# Altium PCB ESP32.PcbDoc
Units mm, origin at the board's own origin, x right, y up, seen from the top; angles counter-clockwise.
Board outline 66.88 x 28.97 mm, 2 copper layers (Top Layer, Bottom Layer); 62 components, 74 nets, 294 pads, 37 vias.
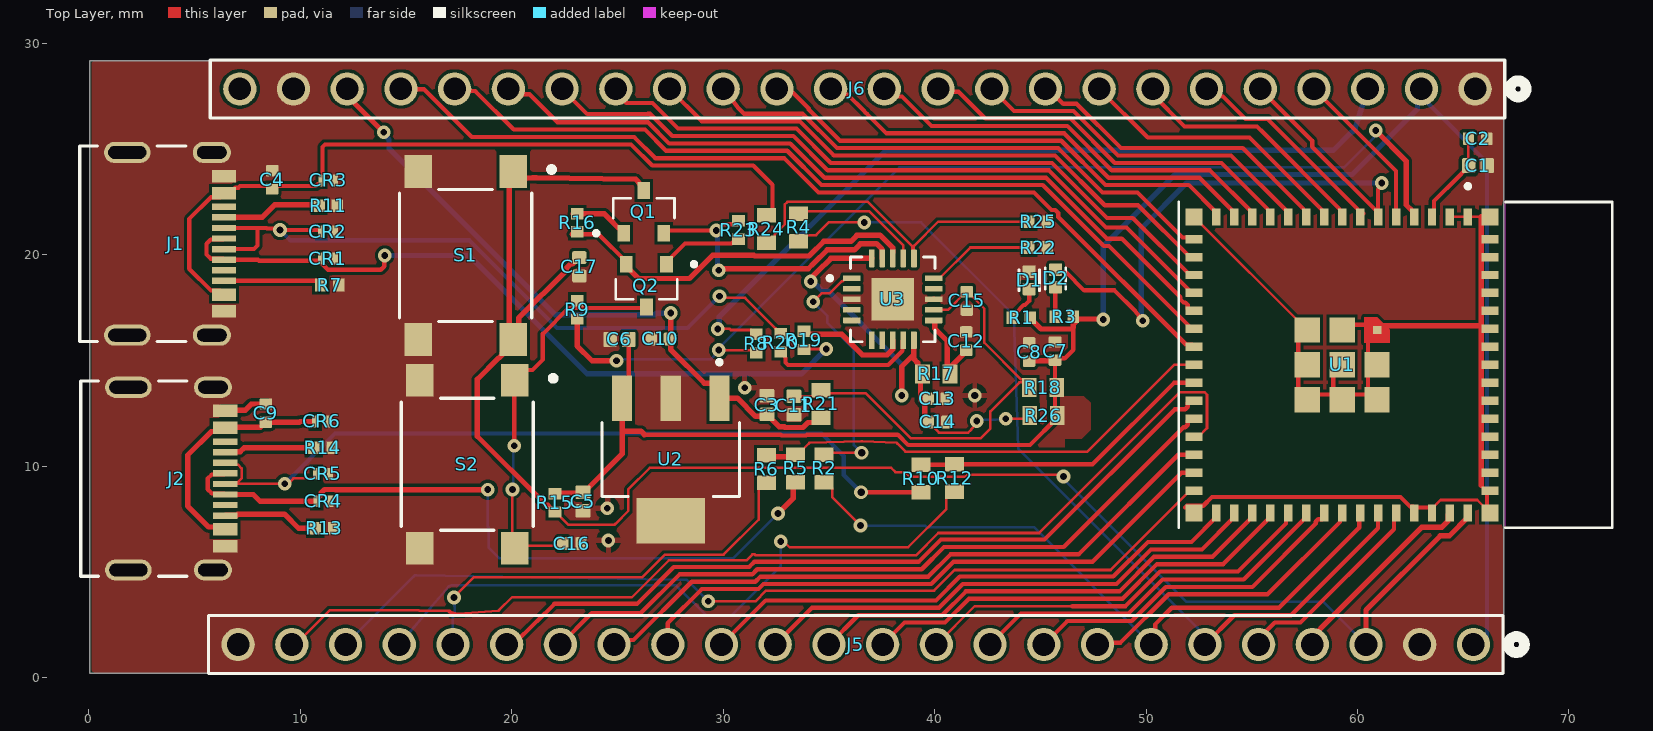
[diagram p0: Top Layer view]
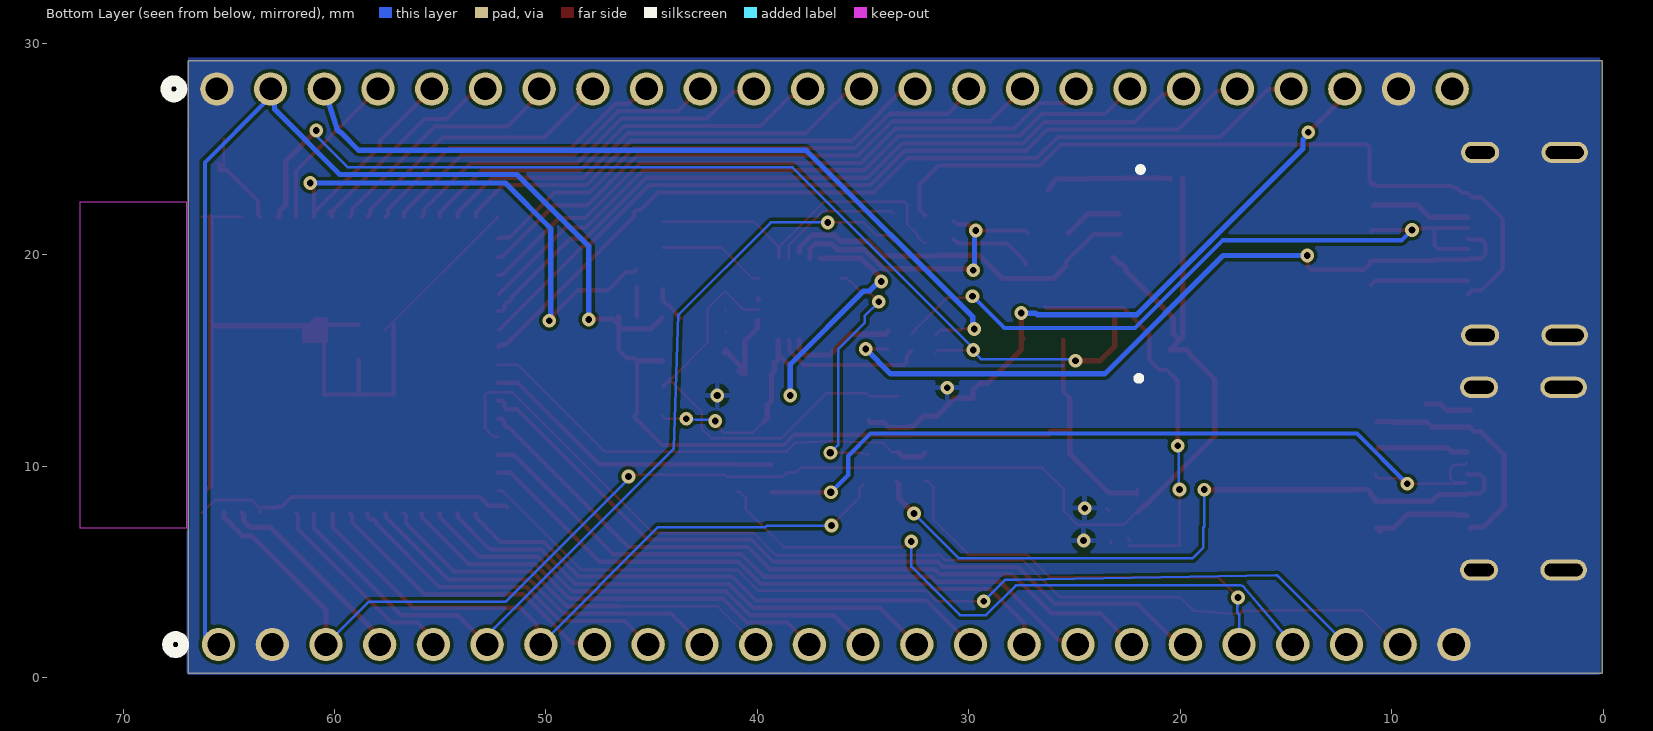
[diagram p1: Bottom Layer view, seen from below]
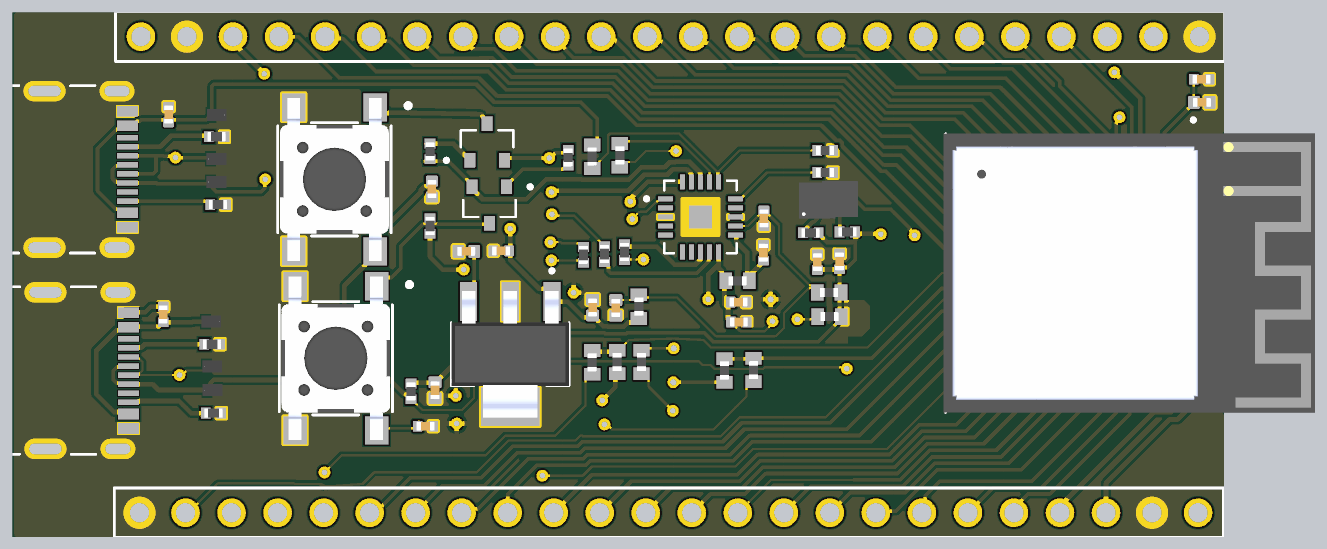
[diagram p2: 3D render of the assembled board from above, using the file's embedded part models]

## Layer stack, top to bottom
Top Solder: solder mask 0.0102, Solder Resist, Dk 3.5
Top Layer: signal copper 0.0356
Dielectric 1: dielectric 0.32, FR-4, Dk 4.8
Bottom Layer: signal copper 0.0356
Bottom Solder: solder mask 0.0102, Solder Resist, Dk 3.5

## Board outline
0.048,0.225 0.048,29.194 66.925,29.194 66.925,0.225

## Design rules (kind name [scope] priority, off if disabled: settings)
Clearance [All] p1: gap=0.15 ignorepadtopadclearanceinfootprint=TRUE
MinimumSolderMaskSliver [All] p1: minsoldermaskwidth=0
PolygonConnect PolygonConnect_9 [All vs IsNamedPolygon('NONET_L01_P003')] p1: thpad.connectstyle=Direct thpad.reliefconductorwidth=0.254 thpad.reliefentries=4 thpad.polygonreliefangle="90 Angle" thpad.airgapwidth=0.254 smdpad.connectstyle=Direct smdpad.reliefconductorwidth=0.254 smdpad.reliefentries=4 smdpad.polygonreliefangle="90 Angle" smdpad.airgapwidth=0.254 via.connectstyle=Relief via.reliefconductorwidth=0.254 via.reliefentries=4 via.polygonreliefangle="90 Angle" via.airgapwidth=0.254
PolygonConnect PolygonConnect_8 [All vs IsNamedPolygon('+3V3_L01_P002')] p2: thpad.connectstyle=Direct thpad.reliefconductorwidth=0.254 thpad.reliefentries=4 thpad.polygonreliefangle="90 Angle" thpad.airgapwidth=0.254 smdpad.connectstyle=Direct smdpad.reliefconductorwidth=0.254 smdpad.reliefentries=4 smdpad.polygonreliefangle="90 Angle" smdpad.airgapwidth=0.254 via.connectstyle=Relief via.reliefconductorwidth=0.254 via.reliefentries=4 via.polygonreliefangle="90 Angle" via.airgapwidth=0.254
PolygonConnect PolygonConnect_7 [All vs IsNamedPolygon('GND_L01_P001')] p3: thpad.connectstyle=Direct thpad.reliefconductorwidth=0.254 thpad.reliefentries=4 thpad.polygonreliefangle="90 Angle" thpad.airgapwidth=0.254 smdpad.connectstyle=Direct smdpad.reliefconductorwidth=0.254 smdpad.reliefentries=4 smdpad.polygonreliefangle="90 Angle" smdpad.airgapwidth=0.254 via.connectstyle=Relief via.reliefconductorwidth=0.254 via.reliefentries=4 via.polygonreliefangle="90 Angle" via.airgapwidth=0.254
PolygonConnect PolygonConnect_6 [All vs IsNamedPolygon('GND_L01_P001')] p4: connectstyle=Relief reliefconductorwidth=0.254 reliefentries=4 polygonreliefangle="90 Angle" airgapwidth=0.254
PolygonConnect PolygonConnect_5 [All vs IsNamedPolygon('GND_L01_P001')] p5: thpad.connectstyle=Direct thpad.reliefconductorwidth=0.254 thpad.reliefentries=4 thpad.polygonreliefangle="90 Angle" thpad.airgapwidth=0.254 smdpad.connectstyle=Direct smdpad.reliefconductorwidth=0.254 smdpad.reliefentries=4 smdpad.polygonreliefangle="90 Angle" smdpad.airgapwidth=0.254 via.connectstyle=Relief via.reliefconductorwidth=0.254 via.reliefentries=4 via.polygonreliefangle="90 Angle" via.airgapwidth=0.254
PolygonConnect PolygonConnect_4 [All vs IsNamedPolygon('GND_L01_P001')] p6: thpad.connectstyle=Direct thpad.reliefconductorwidth=0.254 thpad.reliefentries=4 thpad.polygonreliefangle="90 Angle" thpad.airgapwidth=0.254 smdpad.connectstyle=Direct smdpad.reliefconductorwidth=0.254 smdpad.reliefentries=4 smdpad.polygonreliefangle="90 Angle" smdpad.airgapwidth=0.254 via.connectstyle=Relief via.reliefconductorwidth=0.254 via.reliefentries=4 via.polygonreliefangle="90 Angle" via.airgapwidth=0.254
PolygonConnect PolygonConnect_3 [All vs IsNamedPolygon('GND_L01_P001')] p7: thpad.connectstyle=Direct thpad.reliefconductorwidth=0.254 thpad.reliefentries=4 thpad.polygonreliefangle="90 Angle" thpad.airgapwidth=0.254 smdpad.connectstyle=Direct smdpad.reliefconductorwidth=0.254 smdpad.reliefentries=4 smdpad.polygonreliefangle="90 Angle" smdpad.airgapwidth=0.254 via.connectstyle=Relief via.reliefconductorwidth=0.254 via.reliefentries=4 via.polygonreliefangle="90 Angle" via.airgapwidth=0.254
PolygonConnect PolygonConnect_2 [All vs IsNamedPolygon('GND_L01_P001')] p8: thpad.connectstyle=Direct thpad.reliefconductorwidth=0.254 thpad.reliefentries=4 thpad.polygonreliefangle="90 Angle" thpad.airgapwidth=0.254 smdpad.connectstyle=Relief smdpad.reliefconductorwidth=0.254 smdpad.reliefentries=4 smdpad.polygonreliefangle="90 Angle" smdpad.airgapwidth=0.254 via.connectstyle=Relief via.reliefconductorwidth=0.254 via.reliefentries=4 via.polygonreliefangle="90 Angle" via.airgapwidth=0.254
PolygonConnect PolygonConnect_1 [All vs IsNamedPolygon('GND_L02_P000')] p9: thpad.connectstyle=Direct thpad.reliefconductorwidth=0.254 thpad.reliefentries=4 thpad.polygonreliefangle="90 Angle" thpad.airgapwidth=0.254 smdpad.connectstyle=Relief smdpad.reliefconductorwidth=0.254 smdpad.reliefentries=4 smdpad.polygonreliefangle="90 Angle" smdpad.airgapwidth=0.254 via.connectstyle=Relief via.reliefconductorwidth=0.254 via.reliefentries=4 via.polygonreliefangle="90 Angle" via.airgapwidth=0.254
PolygonConnect [All] p10: connectstyle=Relief reliefconductorwidth=0.254 reliefentries=4 polygonreliefangle="90 Angle" airgapwidth=0.254
RoutingVias [All] p1: holewidth=0.35 width=0.63 viastyle="Through Hole" minholewidth=0.3 minwidth=0.65 maxholewidth=0.32 maxwidth=0.6
SilkToSolderMaskClearance [IsPad] p1: minsilkscreentomaskgap=0.1 clearancetoexposedcopper=TRUE
SolderMaskExpansion [All] p1: expansion=0.102 istentingtop=FALSE
Width Width_1 [All] p1: maxlimit=0.254 minlimit=0.12 preferedwidth=0.2
28 further rules are at their usual default settings.

## Components (designator, comment, footprint, x,y, rotation, side; value= is the part's Value field where it differs from the comment)
C1 "10uF,10V" CAPC1005X90N 65.7,24.225 r0 top
C2 "0.1uF,50V" CAPC1005X55N#1 65.682,25.5 r180 top
C3 "4.7uF" CAPC1005X55N#2 32.075,12.9 r270 top
C4 "0.1uF,50V" CAPC1005X55N#1 8.675,23.55 r270 top
C5 "10uF" CAPC1005X90N 23.375,8.336 r90 top
C6 "10uF" CAPC1005X90N 25.1,16 r0 top
C7 "0.1uF,50V" CAPC1005X55N#1 45.7,15.45 r270 top
C8 "0.1uF,50V" CAPC1005X55N#1 44.475,15.407 r270 top
C9 "0.1uF,50V" CAPC1005X55N#1 8.375,12.518 r270 top
C10 "0.1uF,50V" CAPC1005X55N#1 27.025,16.025 r0 top
C11 "4.7uF" CAPC1005X55N#2 33.35,12.875 r90 top
C12 "100nF,50V" CAPC1005X55N#1 41.5,15.925 r270 top
C13 "100nF,50V" CAPC1005X55N#1 40.125,13.2 r180 top
C14 "100nF,50V" CAPC1005X55N#1 40.143,12.1 r180 top
C15 "100nF,50V" CAPC1005X55N#1 41.525,17.825 r90 top
C16 "100nF,50V" CAPC1005X55N#1 22.85,6.35 r180 top
C17 "1uF,35V" CAPC1005X65N 23.2,19.437 r270 top
CR1 "AQ3045-01ETG" RTVS_SOD882_LTF 11.308,19.825 r0 top
CR2 "AQ3045-01ETG" RTVS_SOD882_LTF 11.308,21.1 r0 top
CR3 "AQ3045-01ETG" RTVS_SOD882_LTF 11.325,23.525 r180 top
CR4 "AQ3045-01ETG" RTVS_SOD882_LTF 11.1,8.35 r0 top
CR5 "AQ3045-01ETG" RTVS_SOD882_LTF 11.075,9.65 r0 top
CR6 "AQ3045-01ETG" RTVS_SOD882_LTF 11.025,12.125 r180 top
D1 "GREEN" LEDC1005X35N 44.475,18.8 r90 top
D2 "RED" LEDC1005X35N 45.725,18.885 r90 top
J1 "2171790001" MOLEX_2171790001 2.975,20.525 r270 top
J2 "2171790001" MOLEX_2171790001 3.025,9.42 r270 top
J5 "22284245" CONN_SD-42375-001_M295_24_MOL 65.485,1.575 r0 top
J6 "22284245" CONN_SD-42375-001_M295_24_MOL 65.565,27.85 r0 top
Q1 "SS8050-G" TRANS_SS8050-G 26.25,22.035 r90 top
Q2 "SS8050-G" TRANS_SS8050-G 26.375,18.55 r270 top
R1 "1k" RESC1005X40N#1 44.105,17.025 r180 top
R2 "0R" RESC1005X40 34.775,9.9 r270 top
R3 "1k" RESC1005X40N#1 46.13,17.075 r180 top
R4 "0R" RESC1005X40 33.575,21.3 r90 top
R5 "0R" RESC1005X40 33.425,9.9 r270 top
R6 "0R" RESC1005X40 32.05,9.875 r270 top
R7 "5.1k" RESC1005X40N#2 11.4,18.575 r180 top
R8 "27ohm" RESC1005X40N#2 31.575,15.807 r270 top
R9 "27ohm" RESC1005X40N#2 23.1,17.4 r270 top
R10 "0R" RESC1005X40 39.35,9.425 r270 top
R11 "5.1k" RESC1005X40N#2 11.325,22.325 r180 top
R12 "0R" RESC1005X40 40.95,9.45 r270 top
R13 "5.1k" RESC1005X40N#2 11.15,7.075 r180 top
R14 "5.1k" RESC1005X40N#2 11.075,10.875 r180 top
R15 "AC0402FR-0710KL" RESC1005X37N 22.05,8.275 r90 top
R16 "AC0402FR-0710KL" RESC1005X37N 23.1,21.518 r90 top
R17 "0R" RESC1005X40 40.075,14.375 r180 top
R18 "0R" RESC1005X40 45.125,13.725 r0 top
R19 "27R" RESC1005X40N#2 33.825,15.959 r90 top
R20 "27R" RESC1005X40N#2 32.725,15.85 r270 top
R21 "0R" RESC1005X40 34.625,12.95 r270 top
R22 "10k" RESC1005X37N 44.9,20.35 r0 top
R23 "AC0402FR-0710KL" RESC1005X37N 30.725,21.175 r270 top
R24 "4k7" RESC1005X40 32.05,21.225 r90 top
R25 "10k" RESC1005X37N 44.9,21.575 r0 top
R26 "0R" RESC1005X40 45.15,12.4 r0 top
S1 "SWITCH" SWITCH_43SMTR92LFS 17.825,19.975 r270 top
S2 "SWITCH" SWITCH_43SMTR92LFS 17.9,10.1 r270 top
U1 "ESP32-S3-MINI-1-N8" XCVR_ESP32-S3-MINI-1-N8 59.275,14.8 r270 top
U2 "TL1963A-33DCYR" VREG_TL1963A-33DCYR 27.525,10.325 r270 top
U3 "FT231XQ-R" QFN50P400X400X80-21N 38.025,17.9 r0 top

## Footprints (in the part's own frame and the unit in brackets; to place one, negate y for a bottom-side part, rotate by r counter-clockwise, add the part's x,y. Pads: shape width x height; smd on the part's side, far side on the other; paste and mask are expansions set on the pad)
CAPC1005X55N#1 [mm]
  rrect25% 0.54x0.6 smd: 1(-0.432,0) 2(0.432,0)
  body extent -0.5,-0.25 0.5,0.25, height 0.55
CAPC1005X55N#2 [mm]
  rrect25% 0.64x0.72 smd paste+0 mask+0.102: 1(-0.439,0) 2(0.439,0)
  body extent -0.5,-0.25 0.5,0.25, height 0.55
CAPC1005X65N [mm]
  rrect25% 0.6x0.67 smd: 1(-0.437,0) 2(0.437,0)
  body extent -0.5,-0.25 0.5,0.25, height 0.65
CAPC1005X90N [mm]
  rrect25% 0.64x0.72 smd: 1(-0.439,0) 2(0.439,0)
  body extent -0.5,-0.25 0.5,0.25, height 0.9
CONN_SD-42375-001_M295_24_MOL [mil]
  round 62 hole 42: 1(0,0) 2(-100,0) 3(-200,0) 4(-300,0) 5(-400,0) 6(-500,0) 7(-600,0) 8(-700,0) 9(-800,0) 10(-900,0) 11(-1000,0) 12(-1100,0) 13(-1200,0) 14(-1300,0) 15(-1400,0) 16(-1500,0) 17(-1600,0) 18(-1700,0) 19(-1800,0) 20(-1900,0) 21(-2000,0) 22(-2100,0) 23(-2200,0) 24(-2300,0)
  silkscreen extent -2355,-54 95,54
LEDC1005X35N [mm]
  rrect15% 0.59x0.61 smd: 1(-0.415,0) 2(0.415,0)
  silkscreen extent -0.5,-0.49 0.5,0.49, body extent -1,-1 1,1, height 0.8
MOLEX_2171790001 [mm]
  rect 0.59x1.15 smd mask+0.064: A1B12(-3.2,3.425) A4B9(-2.4,3.425) B1A12(3.2,3.425) B4A9(2.4,3.425)
  rect 0.298x1.15 smd mask+0.064: A5(-1.25,3.425) A6(-0.25,3.425) A7(0.25,3.425) A8(1.25,3.425) B5(1.75,3.425) B6(0.75,3.425) B7(-0.75,3.425) B8(-1.75,3.425)
  oval 1x2.2 hole 0.6 slot 1.8 at 90 deg mask+0.064: SH1(-4.32,-1.15) SH2(4.32,-1.15)
  oval 1x1.8 hole 0.6 slot 1.4 at 90 deg mask+0.064: SH3(-4.32,2.85) SH4(4.32,2.85)
  silkscreen extent -4.62,-3.4 4.62,1.63
QFN50P400X400X80-21N [mm]
  rrect25% 0.84x0.27 smd: 1(-1.935,1) 2(-1.935,0.5) 3(-1.935,0) 4(-1.935,-0.5) 5(-1.935,-1) 11(1.935,-1) 12(1.935,-0.5) 13(1.935,0) 14(1.935,0.5) 15(1.935,1)
  rrect25% 0.27x0.84 smd: 6(-1,-1.935) 7(-0.5,-1.935) 8(0,-1.935) 9(0.5,-1.935) 10(1,-1.935) 16(1,1.935) 17(0.5,1.935) 18(0,1.935) 19(-0.5,1.935) 20(-1,1.935)
  rect 2x2 smd paste-0.37: 21(0,0)
  silkscreen extent -3.07,-2 2,2
RESC1005X37N [mm]
  rect 0.54x0.6 smd: 1(-0.432,0) 2(0.432,0)
  body extent -0.5,-0.25 0.5,0.25, height 0.37
RESC1005X40 [mm]
  rect 0.7x0.9 smd: 1(-0.65,0) 2(0.65,0)
  body extent -0.5,-0.25 0.5,0.25, height 0.4
RESC1005X40N#1 [mm]
  rect 0.54x0.6 smd: 1(-0.43,0) 2(0.43,0)
  body extent -0.5,-0.25 0.5,0.25, height 0.4
RESC1005X40N#2 [mm]
  rect 0.54x0.6 smd: 1(-0.432,0) 2(0.432,0)
  body extent -0.5,-0.25 0.5,0.25, height 0.4
RTVS_SOD882_LTF [mil]
  rect 12x22 smd paste+0 mask+0: 1(-12.5,0) 2(12.5,0)
  body extent -21,-13 21,13, height 22
SWITCH_43SMTR92LFS [mm]
  rect 1.549x1.295 smd: 1(-3.975,2.25) 2(3.975,2.25) 3(-3.975,-2.25) 4(3.975,-2.25)
  silkscreen extent -4.19,-3.12 3.12,4.19, body extent -4.5,-3 4.5,3, height 4.3
TRANS_SS8050-G [mm]
  rect 0.8x0.6 smd: 1(-1.01,0.95) 2(-1.01,-0.95) 3(1.01,0)
  silkscreen extent -1.11,-1.45 0.65,2.35
VREG_TL1963A-33DCYR [mm]
  rect 2.15x0.95 smd: 1(-2.9,2.3) 2(-2.9,0) 3(-2.9,-2.3)
  rect 2.15x3.25 smd: 4(2.9,0)
  silkscreen extent -4.7,-3.25 1.75,3.25, body extent -3.5,-3.25 3.5,3.25, height 1.8
XCVR_ESP32-S3-MINI-1-N8 [mm]
  rect 0.8x0.4 smd: 1(-7,5.95) 2(-7,5.1) 3(-7,4.25) 4(-7,3.4) 5(-7,2.55) 6(-7,1.7) 7(-7,0.85) 8(-7,0) 9(-7,-0.85) 10(-7,-1.7) 11(-7,-2.55) 12(-7,-3.4) 13(-7,-4.25) 14(-7,-5.1) 15(-7,-5.95) 31(7,-5.95) 32(7,-5.1) 33(7,-4.25) 34(7,-3.4) 35(7,-2.55) 36(7,-1.7) 37(7,-0.85) 38(7,0) 39(7,0.85) 40(7,1.7) 41(7,2.55) 42(7,3.4) 43(7,4.25) 44(7,5.1) 45(7,5.95)
  rect 0.4x0.8 smd: 16(-5.95,-7) 17(-5.1,-7) 18(-4.25,-7) 19(-3.4,-7) 20(-2.55,-7) 21(-1.7,-7) 22(-0.85,-7) 23(0,-7) 24(0.85,-7) 25(1.7,-7) 26(2.55,-7) 27(3.4,-7) 28(4.25,-7) 29(5.1,-7) 30(5.95,-7) 46(5.95,7) 47(5.1,7) 48(4.25,7) 49(3.4,7) 50(2.55,7) 51(1.7,7) 52(0.85,7) 53(0,7) 54(-0.85,7) 55(-1.7,7) 56(-2.55,7) 57(-3.4,7) 58(-4.25,7) 59(-5.1,7) 60(-5.95,7)
  rect 1.2x1.2 smd: 61(0,0) 61_2(0,1.65) 61_3(1.65,1.65) 61_4(1.65,0) 61_5(1.65,-1.65) 61_6(0,-1.65) 61_7(-1.65,-1.65) 61_8(-1.65,0)
  rect 0.4x0.4 smd paste-1 mask+0: 61_1(-1.65,1.65)
  rect 0.8x0.8 smd: 62(-7,7) 63(-7,-7) 64(7,-7) 65(7,7)
  Top Layer region: -1.05,1.05 -2.25,1.05 -2.25,1.65 -1.65,2.25 -1.05,2.25
  Keep-Out Layer region: 7.7,7.725 -7.7,7.725 -7.7,12.775 7.7,12.775
  Keep-Out Layer region: 7.7,7.725 -7.7,7.725 -7.7,12.775 7.7,12.775
  silkscreen extent -8.55,-7.73 7.7,12.78, body extent -7.7,-7.84 7.7,12.66, height 2.55

## Part data
C1 C5 C6: library part CL05A106MP8NUB8, "10 ÂµF Â±20% 10V Ceramic Capacitor X5R 0402 (1005 Metric)", Package="SMD-2 Samsung", Check_prices=https://www.snapeda.com/parts/CL05A106MP8NUB8/Samsung/view-part/?ref=eda, MF="Samsung Electro-Mechanics", MP=CL05A106MP8NUB8, SnapEDA_Link=https://www.snapeda.com/parts/CL05A106MP8NUB8/Samsung/view-part/?ref=snap
C2 C4 C7 C8 C9 C10 C12 C13 C14 C15 C16: library part CL05B104KB5NNNC, "0.1 ÂµF Â±10% 50V Ceramic Capacitor X7R 0402 (1005 Metric)", Package="SMD-2 Samsung", Check_prices=https://www.snapeda.com/parts/CL05B104KB5NNNC/Samsung/view-part/?ref=eda, MF="Samsung Electro-Mechanics", MP=CL05B104KB5NNNC, SnapEDA_Link=https://www.snapeda.com/parts/CL05B104KB5NNNC/Samsung/view-part/?ref=snap
C3 C11: library part CL05A475MO5LUNC, "4.7 ÂµF Â±20% 16V Ceramic Capacitor X5R 0402 (1005 Metric)", Package="SMD-2 Samsung", Check_prices=https://www.snapeda.com/parts/CL05A475MO5LUNC/Samsung/view-part/?ref=eda, MF="Samsung Electro-Mechanics", MP=CL05A475MO5LUNC, SnapEDA_Link=https://www.snapeda.com/parts/CL05A475MO5LUNC/Samsung/view-part/?ref=snap
C17: library part CL05A105KL5NRNC, "1 ÂµF Â±10% 35V Ceramic Capacitor X5R 0402 (1005 Metric)", Package="SMD-2 Samsung", Check_prices=https://www.snapeda.com/parts/CL05A105KL5NRNC/Samsung/view-part/?ref=eda, MF=Samsung, MP=CL05A105KL5NRNC, SnapEDA_Link=https://www.snapeda.com/parts/CL05A105KL5NRNC/Samsung/view-part/?ref=snap
CR1 CR2 CR3 CR4 CR5 CR6: "Description", Manufacturer_Name="Littelfuse Inc", Copyright="Copyright (C) 2025 Ultra Librarian. All rights reserved.", Manufacturer_Part_Number=AQ3045-01ETG, RefDes=RefDes, Type=Type
D1 D2: library part VLMG1500-GS08, "Yellow-Green 571nm LED Indication - Discrete 2V 0402 (1005 Metric)", Package=Connector, Check_prices=https://www.snapeda.com/parts/VLMG1500-GS08/Vishay+Semiconductor+Opto+Division/view-part/?ref=eda, MF=Vishay, MP=VLMG1500-GS08, SnapEDA_Link=https://www.snapeda.com/parts/VLMG1500-GS08/Vishay+Semiconductor+Opto+Division/view-part/?ref=snap
J1: "USB Type C - Connector, Top-mount SMT, 16pos", JLCPCB Part #=C3197684, Manufacturer=Molex, Manufacturer Part #=217179-0001, Package=SMD, Check_prices=https://www.snapeda.com/parts/217179-0001/Molex/view-part/?ref=eda, SnapEDA_Link=https://www.snapeda.com/parts/217179-0001/Molex/view-part/?ref=snap
J2: "USB Type C - Connector, Top-mount SMT, 16pos", JLCPCB Part #=C3197684, Manufacturer=Molex, Package=SMD, Check_prices=https://www.snapeda.com/parts/217179-0001/Molex/view-part/?ref=eda, Manufacturer Part #=2171790001, SnapEDA_Link=https://www.snapeda.com/parts/217179-0001/Molex/view-part/?ref=snap
J5 J6: "Connector Header Through Hole 24 position 0.100 (2.54mm)", Package=None, Check_prices=https://www.snapeda.com/parts/22-28-4245/Molex/view-part/?ref=eda, MF=Molex, MP=22-28-4245, SnapEDA_Link=https://www.snapeda.com/parts/22-28-4245/Molex/view-part/?ref=snap
Q1 Q2: "Bipolar (BJT) Transistor NPN 25 V 1.5 A 100MHz 300 mW Surface Mount SOT-23-3", Package=None, Check_prices=https://www.snapeda.com/parts/SS8050G/Comchip/view-part/?ref=eda, Digi-Key_Part_Number=641-1790-2-ND, MF=Comchip, MP=SS8050G, SnapEDA_Link=https://www.snapeda.com/parts/SS8050G/Comchip/view-part/?ref=snap
R1 R3: library part RC0402FR-071KL, "1 kOhms Â±1% 0.063W, 1/16W Chip Resistor 0402 (1005 Metric) Moisture Resistant Thick Film", Package="0402-2 YAGEO", Check_prices=https://www.snapeda.com/parts/RC0402FR071KL/Yageo/view-part/?ref=eda, MF="Yageo Corporation", MP=RC0402FR071KL, SnapEDA_Link=https://www.snapeda.com/parts/RC0402FR071KL/Yageo/view-part/?ref=snap
R2 R4 R5 R6 R10 R12 R17 R18 R21 R26: library part RC0402JR-070RL, "0 Ohms Jumper 0.063W, 1/16W Chip Resistor 0402 (1005 Metric) Moisture Resistant Thick Film", Package="0402 Yageo", Check_prices=https://www.snapeda.com/parts/RC0402JR-070RL/Yageo/view-part/?ref=eda, Digi-Key_Part_Number=311-0.0JRTR-ND, MF=Yageo, MP=RC0402JR-070RL, Purchase-URL=https://pricing.snapeda.com/search/part/RC0402JR-070RL/?ref=eda, SnapEDA_Link=https://www.snapeda.com/parts/RC0402JR-070RL/Yageo/view-part/?ref=snap
R7 R8 R9 R11 R13 R14 R19 R20: library part RC0402FR-0727RL, "27 Ohms Â±1% 0.063W, 1/16W Chip Resistor 0402 (1005 Metric) Moisture Resistant Thick Film", Package="1005 Panasonic Electronic Components", Check_prices=https://www.snapeda.com/parts/RC0402FR-0727RL/Yageo/view-part/?ref=eda, MF=Yageo, MP=RC0402FR-0727RL, SnapEDA_Link=https://www.snapeda.com/parts/RC0402FR-0727RL/Yageo/view-part/?ref=snap
R15 R16 R23: "10 kOhms Â±1% 0.063W, 1/16W Chip Resistor 0402 (1005 Metric) Automotive AEC-Q200, Moisture Resistant Thick Film", Package="1005 Yageo", Check_prices=https://www.snapeda.com/parts/AC0402FR-0710KL/Yageo/view-part/?ref=eda, Digi-Key_Part_Number=YAG3436TR-ND, MF=Yageo, MP=AC0402FR-0710KL, Purchase-URL=https://pricing.snapeda.com/search/part/AC0402FR-0710KL/?ref=eda, SnapEDA_Link=https://www.snapeda.com/parts/AC0402FR-0710KL/Yageo/view-part/?ref=snap
R22 R25: library part AC0402FR-0710KL, "10 kOhms Â±1% 0.063W, 1/16W Chip Resistor 0402 (1005 Metric) Automotive AEC-Q200, Moisture Resistant Thick Film", Package="1005 Yageo", Check_prices=https://www.snapeda.com/parts/AC0402FR-0710KL/Yageo/view-part/?ref=eda, Digi-Key_Part_Number=YAG3436TR-ND, MF=Yageo, MP=AC0402FR-0710KL, Purchase-URL=https://pricing.snapeda.com/search/part/AC0402FR-0710KL/?ref=eda, SnapEDA_Link=https://www.snapeda.com/parts/AC0402FR-0710KL/Yageo/view-part/?ref=snap
R24: library part RC0402FR-074K7L, "4.7 kOhms Â±1% 0.063W, 1/16W Chip Resistor 0402 (1005 Metric) Moisture Resistant Thick Film", Package="1005 Panasonic Electronic Components", Check_prices=https://www.snapeda.com/parts/RC0402FR-074K7L/Yageo/view-part/?ref=eda, MF=Yageo, MP=RC0402FR-074K7L, SnapEDA_Link=https://www.snapeda.com/parts/RC0402FR-074K7L/Yageo/view-part/?ref=snap
S1 S2: library part PTS645SK50SMTR92LFS, "Switch;Tactile;SPST-NO;OFF-MOM;Top Actuator;260 Grams;4.3mm;.05A;12VDC;Gull Wing", Package=None, Check_prices=https://www.snapeda.com/parts/PTS645SK50SMTR92%20LFS/C%2526K/view-part/?ref=eda, MF=C&K, MP="PTS645SK50SMTR92 LFS", SnapEDA_Link=https://www.snapeda.com/parts/PTS645SK50SMTR92%20LFS/C%2526K/view-part/?ref=snap
U1: JLCPCB Part #=C2913206, Manufacturer="Espressif Systems", Package=SMD, MFR.Part #=ESP32-S3-MINI-1-N8
U2: "1.5-A, 20-V, low-dropout voltage regulator with reverse current & reverse voltage protection", Package="SOT-223-4 Texas Instruments", Check_prices=https://www.snapeda.com/parts/TL1963A-33DCYR/Texas+Instruments/view-part/?ref=eda, MF="Texas Instruments", MP=TL1963A-33DCYR, SnapEDA_Link=https://www.snapeda.com/parts/TL1963A-33DCYR/Texas+Instruments/view-part/?ref=snap
U3: "USB2.0 Full Speed IC offers a compact bridge to full handshake UART Interface", Package=None, Availability=Unavailable, MP=FT231XQ-R, Price=None

## Via types
v1: diameter 0.65, hole 0.32, Top Layer to Bottom Layer, 34 vias
v2: diameter 0.65, hole 0.35, Top Layer to Bottom Layer, 3 vias

## Nets (pads, with @x,y where several pads share a name; then routed paths per layer and width w, separated by ;. In a path a pad name is that pad's centre, name@x,y a point inside that pad or via, vN(x,y) a via of type N, cw(c..) or ccw(c..) an arc to the next point about the centre after c; other vN are vias at no path point)
+3V3: C5.2 C6.2 C7.2 C8.2 J5.1 J6.2 R1.1 R3.1 R15.2 R18.2 R26.2 U2.3 | length 90.8
  Top Layer w0.12: R15.2@22.025,8.907 R15.2@22.137,8.795
  Top Layer w0.2: U2.3 25.539,13.539 C6.2 ; 26.275,11.5 32.728,11.5 32.766,11.462 33.934,11.462 33.972,11.5 38.262,11.5 38.752,11.01 44.51,11.01 45.8,12.3 R26.2 45.7,12.5 C7.2@45.7,14.938 ; C7.2@45.793,15.111 46.161,15.111 46.56,15.51 46.56,16.498 ; 46.56,16.68 R3.1@46.742,16.862 ; R3.1@46.753,16.882 46.84,16.97 ; v1@47.955,16.97 v1(47.975,16.95)
  Top Layer w0.254: R15.2 22.084,8.741 23.341,8.741 C5.2 23.415,8.775 25.225,10.585 25.225,11.667 ; U2.3 25.225,11.667 ; 26.275,11.5 26.108,11.667 25.225,11.667 ; C8.2 44.496,14.996 C7.2@45.678,14.996 ; R1.1 44.535,16.995 45.032,16.498 46.471,16.498 46.56,16.587 46.56,16.68 R3.1 ; 46.84,16.97 v1@47.955,16.97 ; J6.2@63.025,27.675 J6.2
  Bottom Layer w0.2: J6.2@63.025,27.275 63.228,27.275 66.13,24.373 J5.1@66.13,1.425
  Bottom Layer w0.254: v1(47.975,16.95) 47.975,20.403 51.376,23.804 59.754,23.804 62.84,26.89 62.84,27.24 62.875,27.275 63.025,27.275 J6.2
+3V3_FTDI: C13.2 C14.2 R17.2 R26.1 U3.10 U3.20 | length 22.5
  Top Layer w0.12: C14.2@39.711,12.102 C14.2 40.211,11.6 40.248,11.6 40.258,11.59 41.59,11.59 41.729,11.729 41.729,11.735 42,12.007 v1(42,12.15) ; v1(43.369,12.25) 44.35,12.25 R26.1
  Top Layer w0.254: v1(34.15,18.744) 34.226,18.82 34.226,18.973 34.468,19.215 34.474,19.215 35.094,19.835 U3.20 ; v1(38.45,13.35) 38.45,14.717 39.017,15.284 ; U3.10@39.017,15.68 39.017,15.957 U3.10 ; U3.10@39.025,15.68 39.025,15.284 39.025,15.075 39.202,14.898 39.202,14.507 39.334,14.375 39.334,13.109 39.544,12.899 39.544,12.269 C14.2@39.711,12.102
  Bottom Layer w0.12: v1(42,12.15) 42.143,12.15 42.193,12.2 42.804,12.2 42.903,12.2 v1(43.369,12.25)
  Bottom Layer w0.254: v1(34.15,18.744) 34.242,18.744 34.695,18.291 34.984,18.291 38.45,14.825 v1(38.45,13.35)
+5V: C3.2 C10.2 J6.22 R21.2 U2.1 | length 31.6
  Top Layer w0.254: J6.22 12.225,27.524 v1(13.949,25.8) ; C10.2 27.522,15.96 27.522,15.528 29.118,13.932 29.477,13.932 29.825,13.584 U2.1 30.681,13.225 31.541,12.365 32.161,12.365 32.649,11.877 32.884,11.877 32.922,11.839 33.778,11.839 34.016,12.077 34.652,12.077 R21.2@34.725,12.15 ; C10.2@27.457,16.055 27.525,16.123 v1(27.525,17.25)
  Bottom Layer w0.254: J6.22 12.581,27.85 12.656,27.776 J6.22@12.71,27.721 ; v1(13.949,25.8) 13.949,25.704 14.2,25.453 14.2,25.025 22.049,17.176 26.776,17.176 26.85,17.25 v1(27.525,17.25)
+5V_VBUS1: C4.2 CR3.2 J1.A4B9 J1.B4A9 R24.2 | length 36.9
  Top Layer w0.2: J1.B4A9 6.205,18.32 5.777,18.32 4.75,19.347 4.75,21.703 5.777,22.73 6.205,22.73 J1.A4B9 6.68,22.925 6.935,23.18 7.079,23.18 7.156,23.257 10.74,23.257 10.828,23.346 10.955,23.346 11.007,23.398 CR3.2 11.056,23.573 11.056,25.108 11.173,25.225 25.65,25.225 26.65,24.225 31.425,24.225 32.331,23.319 32.331,22.125 32.081,21.875 R24.2
+5V_VBUS2: C9.2 CR6.2 J2.A4B9 J2.B4A9 | length 11.1
  Top Layer w0.254: J2.B4A9@6.3,7.05 6.215,7.135 5.665,7.135 4.675,8.125 4.675,10.525 5.802,11.652 6.102,11.652 6.3,11.85 8.109,11.85 C9.2@8.345,12.086 ; C9.2 9.961,12.086 10,12.125 CR6.2
BTN_GPIO0: C16.2 Q2.3 R9.1 S2.1 S2.2 | length 18.9
  Top Layer w0.12: v1(20.037,8.912) 20.037,6.238 C16.2@22.46,6.238 ; C16.2@22.35,6.475 C16.2@22.48,6.605
  Top Layer w0.2: v1(20.125,10.975) 20.125,14.05 20.631,14.556 20.981,14.556 21.475,15.05 21.475,16.267 22.696,17.488 26.323,17.488 Q2.3
  Bottom Layer w0.12: v1(20.037,8.912) 20.081,8.956 20.081,10.931 v1(20.125,10.975)
CHIP_PU: C17.1 J5.3 Q1.3 R15.1 S1.1 S1.2 U1.45 | length 82.6
  Top Layer w0.12: R15.1 22.08,7.843 22.638,7.285 22.673,7.25 24.522,7.24 ccw(c24.525,7.775) 24.541,7.24 24.875,7.25 24.91,7.285 25.525,7.9 25.525,8.925 26.535,9.935 37.94,9.935 38.15,9.725 38.603,9.725 38.813,9.515 41.462,9.515 41.547,9.6 46.025,9.6 v1(46.1,9.525)
  Top Layer w0.254: S1.1@19.887,23.625 19.887,16.111 20.475,15.523 19.725,15.523 19.554,15.352 19.554,15.275 19.406,15.127 19.388,15.127 18.375,14.114 18.375,11.425 21.473,8.327 21.473,8.322 21.635,8.16 21.703,8.16 R15.1@22.02,7.843 ; S1.2 20.333,16.258 20.333,17.007 22.588,19.262 22.588,19.371 22.794,19.577 22.868,19.577 23.165,19.874 C17.1 ; S1.1@20.482,23.593 20.475,23.6 20.996,23.656 21.17,23.653 25.88,23.575 25.973,23.482 26.077,23.318 Q1.3 ; J5.3 60.405,3.205 63.919,6.719 64.344,6.719 65.225,7.6 U1.45
  Bottom Layer w0.12: v1(46.1,9.525) 46.1,9.395 51.895,3.6 58.38,3.6 J5.3
CON1_USB_N: CR2.1 J1.A7 J1.B7 R20.1 | length 34.1
  Top Layer w0.12: v1(29.825,18.05) 29.912,17.963 31.044,17.963 32.485,16.522 32.485,16.492 32.695,16.282 R20.1
  Top Layer w0.2: J1.A7 7.813,20.275 7.977,20.439 7.977,21.275 ; J1.B7 7.977,21.275 ; CR2.1 10.99,21.123 10.938,21.175 v1(9.05,21.175) 8.973,21.252 8.425,21.252 8.402,21.275 7.977,21.275
  Bottom Layer w0.2: v1(9.05,21.175) 9.536,20.689 18.003,20.689 22.142,16.55 28.325,16.55 v1(29.825,18.05)
CON1_USB_P: CR1.1 J1.A6 J1.B6 R19.1 | length 35.5
  Top Layer w0.12: R19.1 33.848,15.55 v1(34.875,15.55)
  Top Layer w0.2: J1.A6 6.351,20.726 5.773,20.726 5.575,20.528 5.575,20.022 5.773,19.824 6.351,19.824 J1.B6 8,19.775 8.05,19.725 11.015,19.725 11.042,19.698 11.042,19.571 11.317,19.296 13.811,19.296 13.975,19.459 13.975,19.95 v1(14,19.975)
  Bottom Layer w0.254: v1(14,19.975) 17.975,19.975 23.577,14.373 33.698,14.373 v1(34.875,15.55)
CON2_USB_N: CR5.1 J2.A7 J2.B7 R10.2 | length 39.6
  Top Layer w0.12: J2.B7 6.539,10.081 7.06,10.081 7.235,9.906 7.235,9.434 7.06,9.259 6.539,9.259 6.452,9.172 9.273,9.172 v1(9.275,9.175) 9.418,9.175 9.674,9.431 10.665,9.431 10.757,9.523 CR5.1
  Top Layer w0.2: v2(36.525,8.775) R10.2
  Bottom Layer w0.2: v1(9.275,9.175) 11.65,11.55 34.65,11.55 35.705,10.495 35.705,9.595 v2(36.525,8.775)
CON2_USB_P: CR4.1 J2.A6 J2.B6 R5.2 | length 34.7
  Top Layer w0.2: J2.B6 6.401,8.719 5.823,8.719 5.625,8.917 5.625,9.423 5.823,9.621 6.401,9.621 J2.A6
  Top Layer w0.254: J2.B6 7.78,8.67 8.1,8.35 CR4.1 10.783,8.477 10.808,8.502 10.839,8.502 10.988,8.651 10.988,8.744 11.15,8.906 11.685,8.906 11.691,8.9 v1(18.875,8.9) ; v1@32.55,7.775 v1(32.6,7.775) 33.325,8.5 33.325,9.175 R5.2@33.4,9.25
  Bottom Layer w0.12: v1(18.875,8.9) 18.875,7.15 18.925,7.1 18.925,6.15 19.425,5.65 30.475,5.65 v1(32.6,7.775)
CON_ESP_USB_N: J5.20 R6.2 | length 20.3
  Top Layer w0.12: v1(17.275,3.8) 17.275,3.818 18.207,4.75 26.175,4.75 27.25,5.825 30.025,5.825 31.685,7.485 31.685,9.035 31.975,9.325 R6.2@32.075,9.325
  Bottom Layer w0.12: J5.20 17.225,3 17.313,3.088 17.313,3.188 v1(17.275,3.8)
CON_ESP_USB_P: J5.21 R12.2 | length 31.8
  Top Layer w0.12: v1(32.725,6.45) 32.868,6.45 33.143,6.175 38.75,6.175 40.56,7.985 40.56,8.51 40.85,8.8 R12.2
  Bottom Layer w0.12: J5.21 17.005,4.309 17.028,4.332 17.149,4.375 27.775,4.375 29.185,2.965 30.431,2.965 32.725,5.259 v1(32.725,6.45)
CON_GPIO0: J6.3 R8.1 | length 38.3
  Top Layer w0.12: v1(29.75,16.5) 29.763,16.513 30.305,16.513 30.369,16.449 31.335,16.449 31.575,16.209 R8.1@31.575,16.182
  Bottom Layer w0.254: v1(29.75,16.5) 29.826,16.576 29.826,17.077 37.699,24.95 58.864,24.95 59.725,25.811 ccw(c59.648,26.053) 59.89,25.976 J6.3
DTR_FTDI: Q2.2 R16.1 U3.18 | length 17.4
  Top Layer w0.2: R16.1@22.834,20.975 24.11,20.975 25.425,19.66 Q2.2
  Top Layer w0.254: Q2.2@25.425,19.46 26.002,18.883 28.408,18.883 29.502,19.977 31.456,19.977 31.485,19.948 34.058,19.948 34.133,20.023 34.14,20.023 34.76,20.643 36.045,20.643 36.327,20.925 36.617,20.925 36.628,20.936 37.422,20.936 38.017,20.341 U3.18@38.017,20.128
ESP_USB_N: R5.1 R6.1 U1.23 | length 22.3
  Top Layer w0.12: R5.1@33.45,10.675 33.65,10.675 34.05,11.075 34.085,11.11 36.534,11.185 cw(c36.55,10.65) 36.575,11.184 38.213,11.11 38.248,11.075 38.623,10.7 47.225,10.7 51.325,14.8 U1.23
  Top Layer w0.254: R6.1@32.075,10.625 32.248,10.452 33.127,10.452 R5.1@33.35,10.675
ESP_USB_P: R10.1 R12.1 U1.24 | length 14.5
  Top Layer w0.2: R10.1 40.925,10.075 R12.1 47.475,10.1 51.325,13.95 U1.24
FTDI_USB_N: R20.2 U3.9 | length 7
  Top Layer w0.2: R20.2 32.755,15.418 32.925,15.248 32.925,15.156 32.95,15.131 32.95,14.909 33.067,14.792 37.812,14.792 38.49,15.47 38.49,15.93 U3.9
FTDI_USB_P: R19.2 U3.8 | length 5.2
  Top Layer w0.254: R19.2 33.964,16.252 35.605,16.252 36.589,15.268 37.755,15.268 38.017,15.53 38.017,15.957 U3.8
GND: C1.2 C2.1 C3.1 C4.1 C5.1 C6.1 C7.1 C8.1 C9.1 C10.1 C11.1 C12.1 C13.1 C14.1 C15.1 C16.1 C17.2 CR1.2 CR2.2 CR3.1 CR4.2 CR5.2 CR6.1 D1.2 J1.A1B12 J1.B1A12 J1.SH1 J1.SH2 J1.SH3 J1.SH4 J2.A1B12 J2.B1A12 J2.SH1 J2.SH2 J2.SH3 J2.SH4 J5.2 J5.24 J6.1 J6.23 R7.1 R11.1 R13.1 R14.1 R22.2 R25.2 S1.3 S1.4 S2.3 S2.4 U2.2 U2.4 U3.3 U3.13 U3.21 | length 2.5
  Top Layer w0.12: C16.1 23.282,6.382 C16.1@23.325,6.425 ; C5.1 C5.1@23.503,8.025 ; C12.1 C12.1@41.513,16.369 ; C15.1@41.513,17.381 C15.1
  Top Layer w0.254: J2.A1B12@6.3,12.65 7.397,12.65 7.694,12.948 8.373,12.948 C9.1 ; U3.13 U3.13@39.968,17.908
  other v1: 24.575,6.5 24.525,8.025 31.022,13.721
  other v2: 41.9,13.35
GPIO0: R8.2 R9.2 U1.4 | length 50.7
  Top Layer w0.12: v1(29.8,15.5) 31.45,15.5 R8.2
  Top Layer w0.254: R9.2 23.1,15.7 23.805,14.995 v1(24.964,14.995) ; v1(60.866,25.878) 62.302,24.442 62.302,22.373 62.602,22.073 62.602,21.873 U1.4
  Bottom Layer w0.12: v1(24.964,14.995) 25.041,15.073 29.428,15.073 29.8,15.444 29.8,15.605 38.336,24.141 59.373,24.141 60.764,25.533 60.764,25.777 v1(60.866,25.878)
GPIO1: J6.4 U1.5 | length 7.7
  Top Layer w0.2: J6.4 61.825,23.97 U1.5
GPIO2: D2.2 J6.5 U1.6 | length 31.6
  Top Layer w0.2: D2.2 45.837,19.188 46.212,19.188 47.075,18.325 48.512,18.325 49.5,17.337 v1(49.841,16.884) ; J6.5 57.858,25.397 57.858,25.117 U1.6@60.975,22 ; U1.6 60.975,21.925 U1.6@60.975,22 ; v1(61.15,23.4) 61.15,23.278 60.975,23.103 U1.6@60.975,22
  Bottom Layer w0.254: v1(49.841,16.884) 49.775,16.95 49.775,21.25 51.925,23.4 v1(61.15,23.4)
GPIO3: J6.6 U1.7 | length 10.1
  Top Layer w0.2: J6.6 53.091,27.624 53.463,27.624 53.601,27.486 53.639,27.486 54.7,26.425 55.75,26.425 60.025,22.15 60.025,22.1 60.075,22.05 60.125,22.05 U1.7 ; U1.7@60.187,22.063 U1.7@60.287,21.963
GPIO4: J6.7 U1.8 | length 11.8
  Top Layer w0.2: J6.7 50.325,27.575 51.825,26.075 55.25,26.075 55.55,25.775 59.175,22.15 59.175,21.9 U1.8
GPIO5: J6.8 U1.9 | length 13.3
  Top Layer w0.2: J6.8 50.085,25.55 54.9,25.55 58.325,22.125 58.325,21.9 U1.9
GPIO6: J6.9 U1.10 | length 15
  Top Layer w0.2: J6.9 45.383,27.85 46.083,27.15 46.715,27.15 48.815,25.05 54.575,25.05 57.475,22.15 57.475,21.9 U1.10
GPIO7: J6.10 U1.11 | length 16.6
  Top Layer w0.2: J6.10 43.755,26.8 46.57,26.8 48.67,24.7 54.025,24.7 56.725,22 U1.11
GPIO8: J6.11 U1.12 | length 18.4
  Top Layer w0.2: J6.11 40.3,27.715 41.135,27.715 42.4,26.45 46.425,26.45 48.525,24.35 53.575,24.35 55.775,22.15 55.775,21.9 U1.12
GPIO9: J6.12 U1.13 | length 20
  Top Layer w0.2: J6.12@37.67,27.805 37.98,27.495 38.455,27.495 39.85,26.1 46.28,26.1 48.38,24 53.025,24 55.025,22 U1.13
GPIO10: J6.13 U1.14 | length 21.7
  Top Layer w0.2: J6.13 35.348,27.587 35.888,27.587 36.683,26.792 ccw(c37.485,27.45) 36.827,26.648 37.725,25.75 46.135,25.75 48.235,23.65 52.525,23.65 54.175,22 U1.14
GPIO11: J6.14 U1.15 | length 23.4
  Top Layer w0.2: J6.14@32.56,27.835 33.14,27.835 34.051,26.924 34.051,26.877 35.528,25.4 45.99,25.4 48.09,23.3 52.025,23.3 53.325,22 U1.15
GPIO12: J6.15 U1.16 | length 25
  Top Layer w0.2: J6.15@30.226,27.629 30.718,26.952 30.995,26.675 33.758,26.675 35.383,25.05 45.845,25.05 47.945,22.95 49.6,22.95 51.725,20.825 52.2,20.825 U1.16
GPIO13: J6.16 U1.17 | length 28.1
  Top Layer w0.2: J6.16 28.99,26.325 33.613,26.325 35.238,24.7 45.7,24.7 48.05,22.35 49.625,22.35 52.075,19.9 U1.17
GPIO14: J6.17 U1.18 | length 30.9
  Top Layer w0.2: J6.17@24.94,27.668 25.42,27.187 26.661,27.187 27.873,25.975 33.468,25.975 35.093,24.35 45.555,24.35 48.155,21.75 49.375,21.75 52.075,19.05 U1.18
GPIO15: J6.18 U1.19 | length 33.9
  Top Layer w0.2: J6.18 23.572,26.663 24.443,26.663 26.097,26.669 26.1,26.669 26.453,26.678 26.541,26.678 27.594,25.625 33.323,25.625 34.948,24 45.41,24 48.11,21.3 49.071,21.3 U1.19@52.223,18.148
GPIO16: J6.19 U1.20 | length 36.6
  Top Layer w0.2: J6.19@20.095,27.6 20.85,27.6 22.175,26.275 26.45,26.275 27.45,25.275 33.178,25.275 34.803,23.65 45.265,23.65 48.146,20.769 48.856,20.769 51.625,18 51.625,17.896 51.771,17.75 51.858,17.75 51.975,17.633 51.975,17.45 52.075,17.35 U1.20
GPIO17: J6.20 U1.21 | length 39.6
  Top Layer w0.2: J6.20@17.32,27.835 17.405,27.75 18.275,27.75 20.1,25.925 26.305,25.925 27.305,24.925 33.033,24.925 34.658,23.3 45.12,23.3 48.001,20.419 48.252,20.419 U1.21@52.223,16.448
GPIO18: J6.21 U1.22 | length 42.7
  Top Layer w0.2: J6.21 14.78,27.835 15.852,27.835 18.113,25.575 25.795,25.575 26.795,24.575 32.888,24.575 34.513,22.95 44.7,22.95 45.525,22.125 45.706,22.125 45.852,21.979 45.852,21.798 51.9,15.75 52.175,15.75 U1.22
GPIO21: J5.19 U1.25 | length 37.9
  Top Layer w0.2: J5.19@19.365,1.89 J5.19@19.84,1.89 ; J5.19 20.075,1.575 21.17,2.67 21.19,2.67 22.02,3.5 25.925,3.5 27.67,5.245 31.233,5.245 31.473,5.485 39.248,5.485 40.303,6.54 45.203,6.54 51.363,12.7 51.858,12.7 51.975,12.817 51.975,13 52.075,13.1 U1.25
GPIO26: J5.18 U1.26 | length 34.5
  Top Layer w0.2: J5.18 23.789,3.059 26.026,3.059 26.109,3.059 27.945,4.895 31.378,4.895 31.618,5.135 39.393,5.135 40.448,6.19 46.111,6.19 51.771,11.85 51.858,11.85 51.975,11.967 51.975,12.15 52.075,12.25 U1.26
GPIO33: J5.17 U1.28 | length 31.1
  Top Layer w0.2: J5.17 25.061,1.791 25.766,1.791 28.52,4.545 31.523,4.545 31.763,4.785 39.7,4.785 40.755,5.84 46.815,5.84 51.525,10.55 U1.28
GPIO34: J5.16 U1.29 | length 28.8
  Top Layer w0.2: J5.16 27.385,2.585 28.995,4.195 31.668,4.195 31.908,4.435 39.845,4.435 40.9,5.49 47.465,5.49 51.675,9.7 U1.29
GPIO35: J5.15 U1.31 | length 26.1
  Top Layer w0.2: J5.15 32.012,3.662 40.063,3.662 41.19,4.79 48.453,4.79 50.088,6.425 52.15,6.425 53.325,7.6 U1.31
GPIO36: J5.14 U1.32 | length 24.4
  Top Layer w0.2: J5.14 34.202,3.312 40.208,3.312 41.335,4.44 48.598,4.44 50.233,6.075 52.65,6.075 54.175,7.6 U1.32
GPIO37: J5.13 U1.33 | length 22.7
  Top Layer w0.2: J5.13 36.392,2.962 40.352,2.962 41.48,4.09 48.743,4.09 50.378,5.725 53.15,5.725 55.025,7.6 U1.33
GPIO38: J5.12 U1.34 | length 21
  Top Layer w0.2: J5.12 38.582,2.612 40.497,2.612 41.625,3.74 48.888,3.74 50.523,5.375 53.65,5.375 55.875,7.6 U1.34
GPIO39: J5.11 U1.35 | length 19.5
  Top Layer w0.12: J5.11 41.9,3.39 46.508,3.39
  Top Layer w0.2: 46.508,3.39 49.033,3.39 50.668,5.025 54.35,5.025 56.625,7.3 56.625,7.7 U1.35
GPIO40: J5.10 U1.36 | length 17.6
  Top Layer w0.2: J5.10 44.09,3.04 49.178,3.04 50.788,4.65 54.625,4.65 57.575,7.6 U1.36
GPIO41: J5.9 U1.37 | length 16
  Top Layer w0.2: J5.9 46.28,2.69 49.323,2.69 50.933,4.3 55.029,4.3 58.025,7.296 58.025,7.383 58.142,7.5 58.325,7.5 58.425,7.6 U1.37
GPIO42: J5.8 U1.38 | length 14.3
  Top Layer w0.2: J5.8 47.794,1.664 48.792,1.664 51.078,3.95 55.75,3.95 59.175,7.375 59.175,7.7 U1.38
GPIO45: J5.5 U1.41 | length 9.6
  Top Layer w0.2: J5.5 55.325,1.85 56.087,2.612 57.312,2.612 61.725,7.025 61.725,7.7 U1.41
GPIO46: J5.4 U1.44 | length 9.5
  Top Layer w0.254: J5.4 57.865,1.932 58.255,2.322 58.255,2.33 63.048,7.123 63.991,7.123 64.243,7.375 64.243,7.378 64.302,7.437 64.302,7.727 U1.44
GPIO47: J5.23 U1.27 | length 51
  Top Layer w0.12: J5.23 9.782,1.575 11.407,3.2 15.6,3.2 15.637,3.163 16.984,3.163 ; 17.176,2.998 16.984,3.163 ; U1.27 52.475,11.4 52.885,11.81 52.885,13.387 52.762,13.51 51.61,13.51 44.95,6.85 40.175,6.85 39.12,5.795 31.53,5.795 31.487,5.838 31.388,5.838 31.105,5.555 27.43,5.555 25.685,3.81 20.02,3.81 19.408,3.198 19.373,3.163 17.487,3.031 cw(c17.45,3.565) 17.168,3.11 17.083,3.163 16.984,3.163
GPIO48: J5.22 U1.30 | length 44.1
  Top Layer w0.12: v1(29.3,3.62) 31.532,3.62 32.037,4.125 39.974,4.125 40.949,5.1 48.325,5.1 52.075,8.85 U1.30
  Bottom Layer w0.12: J5.22 14.837,4.267 15.385,4.815 15.42,4.85 15.518,4.85 27.687,4.645 28.275,4.645 v1(29.3,3.62)
NetC1_1: C1.1 C2.2 U1.3 | length 4.8
  Top Layer w0.12: C2.2 65.25,24.236 C1.1
  Top Layer w0.2: U1.3 63.625,21.9 63.625,22.55 64.797,23.722 64.807,23.722 64.924,23.84 64.924,23.848 65.099,24.023 65.423,24.023 65.423,24.274 C1.1@65.481,24.332
NetC11_2: C11.2 C15.2 R18.1 R21.1 U3.12 | length 21.5
  Top Layer w0.12: C11.2 34.689,13.314 34.825,13.45 36.75,13.45 38.88,11.32 42.17,11.32 42.64,11.79 42.64,12.597 44.013,13.97 44.23,13.97 R18.1 ; U3.12 40.638,17.4 41.495,18.257 C15.2 41.555,18.257 42.35,17.462 42.35,15.85 44.085,14.115 44.185,14.115 44.475,13.825 R18.1@44.431,13.751
NetC12_2: C12.2 R17.1 U3.11 | length 4.8
  Top Layer w0.254: U3.11 39.994,16.9 40.002,16.892 40.002,16.533 40.6,15.935 40.6,15.125 R17.1@40.6,14.723 ; R17.1@40.6,14.375 40.6,14.6 R17.1@40.6,14.723 ; R17.1 R17.1@40.882,14.532 ; C12.2@41.34,15.329 41.381,15.329 41.352,15.3 40.688,14.636 40.6,14.548 R17.1@40.6,14.723 ; C12.2@41.5,15.528 41.5,15.523 41.356,15.379 C12.2@41.577,15.379
NetD1_1: D1.1 R1.2 | length 1.7
  Top Layer w0.2: R1.2 43.845,17.195 43.845,17.259 44.213,17.627 44.277,17.627 44.475,17.825 D1.1
NetD2_1: D2.1 R3.2 | length 1.4
  Top Layer w0.2: R3.2 45.712,17.087 45.712,18.457 D2.1
NetJ1_A5: J1.A5 R11.2 | length 4.7
  Top Layer w0.254: J1.A5 8.2,21.775 8.8,22.375 10.793,22.375 R11.2@10.868,22.3
NetJ1_B5: J1.B5 R7.2 | length 4.7
  Top Layer w0.2: J1.B5 10.681,18.775 10.798,18.775 10.968,18.605 R7.2
NetJ2_A5: J2.A5 R14.2 | length 4.3
  Top Layer w0.254: J2.A5 6.472,10.692 7.163,10.692 7.346,10.875 R14.2
NetJ2_B5: J2.B5 R13.2 | length 4.6
  Top Layer w0.254: J2.B5 6.472,7.692 6.995,7.692 7.047,7.744 9.256,7.744 9.925,7.075 R13.2 ; R13.2@10.568,6.925 R13.2@10.583,6.91
NetQ1_1: Q1.1 R16.2 | length 2.8
  Top Layer w0.254: R16.2@22.905,21.95 24.375,21.95 Q1.1
NetQ2_1: Q2.1 R23.2 | length 3.9
  Top Layer w0.2: Q2.1 27.325,19.66 28.2,20.535 30.408,20.535 30.446,20.573 30.555,20.573 R23.2
NetR22_1: R22.1 U3.15 | length 5.1
  Top Layer w0.12: U3.15 40.245,18.9 41.695,20.35 R22.1
NetU1_1: U1.1 U1.2 U1.42 U1.43 U1.46 U1.47 U1.48 U1.49 U1.50 U1.51 U1.52 U1.53 U1.54 U1.55 U1.56 U1.57 U1.58 U1.59 U1.60 U1.61 U1.61_1 U1.61_2 U1.61_3 U1.61_4 U1.61_5 U1.61_6 U1.61_7 U1.61_8 U1.62 U1.63 U1.64 U1.65 | length 57.3
  Top Layer w0.12: U1.63 U1.61_7 ; U1.43 63.525,8 63.935,8.41 65.665,8.41 66.125,7.95 U1.65 ; U1.2 U1.1 65.85,21.8 U1.62
  Top Layer w0.2: 51.85,8.05 51.937,8.137 52.709,8.137 53.118,8.546 62.032,8.546 62.479,8.1 62.625,8.1 62.675,8.05 U1.43@63.383,8.05 ; U1.61_7@57.2,16.7 57.2,13.4 U1.61_4@58.85,13.4 ; U1.61@58.85,15.05 U1.61_4@58.85,13.4 ; U1.61_8@58.85,16.7 60.5,16.7 60.5,16.65 60.5,13.4 U1.61_4@58.85,13.4 ; 65.85,9.1 66.125,8.825 66.125,7.95 U1.65@66.125,7.923
  Top Layer w0.254: 60.5,16.65 65.85,16.65 ; 65.85,9.1 65.85,16.61 ; 65.85,16.677 65.85,21.8
RTS_FTDI: Q1.2 R23.1 U3.19 | length 14.5
  Top Layer w0.2: Q1.2 27.327,21.152 29.72,21.152 30.017,21.449 30.567,21.449 R23.1
  Top Layer w0.254: v1(29.8,19.275) 29.871,19.346 34.028,19.346 34.3,19.619 34.307,19.619 34.927,20.239 36.213,20.239 36.495,20.521 36.784,20.521 36.795,20.532 37.255,20.532 37.517,20.27 37.517,19.843 U3.19
  Bottom Layer w0.254: v1(29.675,21.15) 29.737,21.088 29.737,19.338 v1(29.8,19.275)
RXD_FTDI: R2.1 U3.1 | length 12.2
  Top Layer w0.12: v1(34.26,17.784) 34.658,18.182 35.04,18.182 35.603,18.745 35.65,18.745 35.805,18.9 U3.1 ; R2.1 35.165,10.65 v2(36.55,10.65)
  Bottom Layer w0.12: v1(34.26,17.784) 34.932,17.112 34.932,16.79 36.19,15.531 36.19,11.01 v2(36.55,10.65)
TXD_FTDI: R4.2 U3.17 | length 6.3
  Top Layer w0.12: R4.2 33.698,22.073 36.898,22.073 38.525,20.446 U3.17
U0RXD: J5.6 R4.1 U1.40 | length 43.6
  Top Layer w0.12: R4.1 33.865,20.94 34.397,20.94 34.995,21.538 v1(36.676,21.538)
  Top Layer w0.2: J5.6 54.172,2.962 56.862,2.962 60.975,7.075 U1.40
  Bottom Layer w0.12: v1(36.676,21.538) 39.362,21.538 43.706,17.194 43.739,17.161 43.905,12.221 43.949,10.851 ; 43.95,10.85 52.441,2.359 52.715,2.039 J5.6@52.785,1.969 ; J5.6 J5.6@52.785,1.969 ; J5.6 J5.6@52.785,1.969 ; J5.6 J5.6@52.785,1.969
U0TXD: J5.7 R2.2 U1.39 | length 31.9
  Top Layer w0.12: R2.2@34.975,9.15 35.165,8.96 35.165,8.535 v1(36.5,7.2)
  Top Layer w0.2: J5.7 50.432,1.762 50.432,2.526 51.219,3.312 56.292,3.312 60.08,7.1 60.08,7.755 U1.39
  Bottom Layer w0.12: v1(36.5,7.2) 39.55,7.2 39.625,7.125 44.695,7.125 J5.7
VBUS_SENSE: R24.1 R25.1 U3.16 | length 16.3
  Top Layer w0.12: R24.1 32.15,20.575 32.44,20.865 32.44,20.965 32.915,21.44 32.915,22.387 33.038,22.51 36.843,22.51 38.95,20.403 38.95,19.91 U3.16 39.025,20.425 40.175,21.575 R25.1
pads on no net: J1.A8 J1.B8 J2.A8 J2.B8 J6.24 U3.2 U3.4 U3.5 U3.6 U3.7 U3.14

## Polygon pours and split planes (outlines as drawn)
GND on Top Layer "GND_L01_P001" (solid, remove dead copper, pour order 1): 0.146,29.088 0.146,0.371 cw(c0.025,0.371) 0.025,0.25 66.925,0.25 66.925,29.175 0.075,29.175 cw(c0.075,29.3) -0.05,29.3
+3V3 on Top Layer "+3V3_L01_P002" (solid, remove dead copper, pour order 2): 43.939,13.325 47.061,13.325 47.379,13.006 47.379,11.725 46.951,11.297 46.161,11.297 46.161,10.586 45.615,10.04 45.099,10.04 44.362,10.777 43.762,10.777 43.914,10.625 43.139,10.625 42.964,10.8 42.964,13.35 43.964,13.35
GND on Bottom Layer "GND_L02_P000" (solid, remove dead copper, pour order 0): 0.138,0.325 0.138,29.277 cw(c0.186,29.277) 0.186,29.325 66.928,29.325 67,0.15 0.263,0.15 cw(c0.263,0.375) 0.038,0.375